# Altium PCB LineFollower2.PcbDoc
Units mm, origin at the board's own origin, x right, y up, seen from the top; angles counter-clockwise.
Board outline 127.85 x 141.85 mm, 2 copper layers (Top Layer, Bottom Layer); 44 components, 62 nets, 172 pads, 4 vias.
Unrouted connection lines stored in the file: 5.
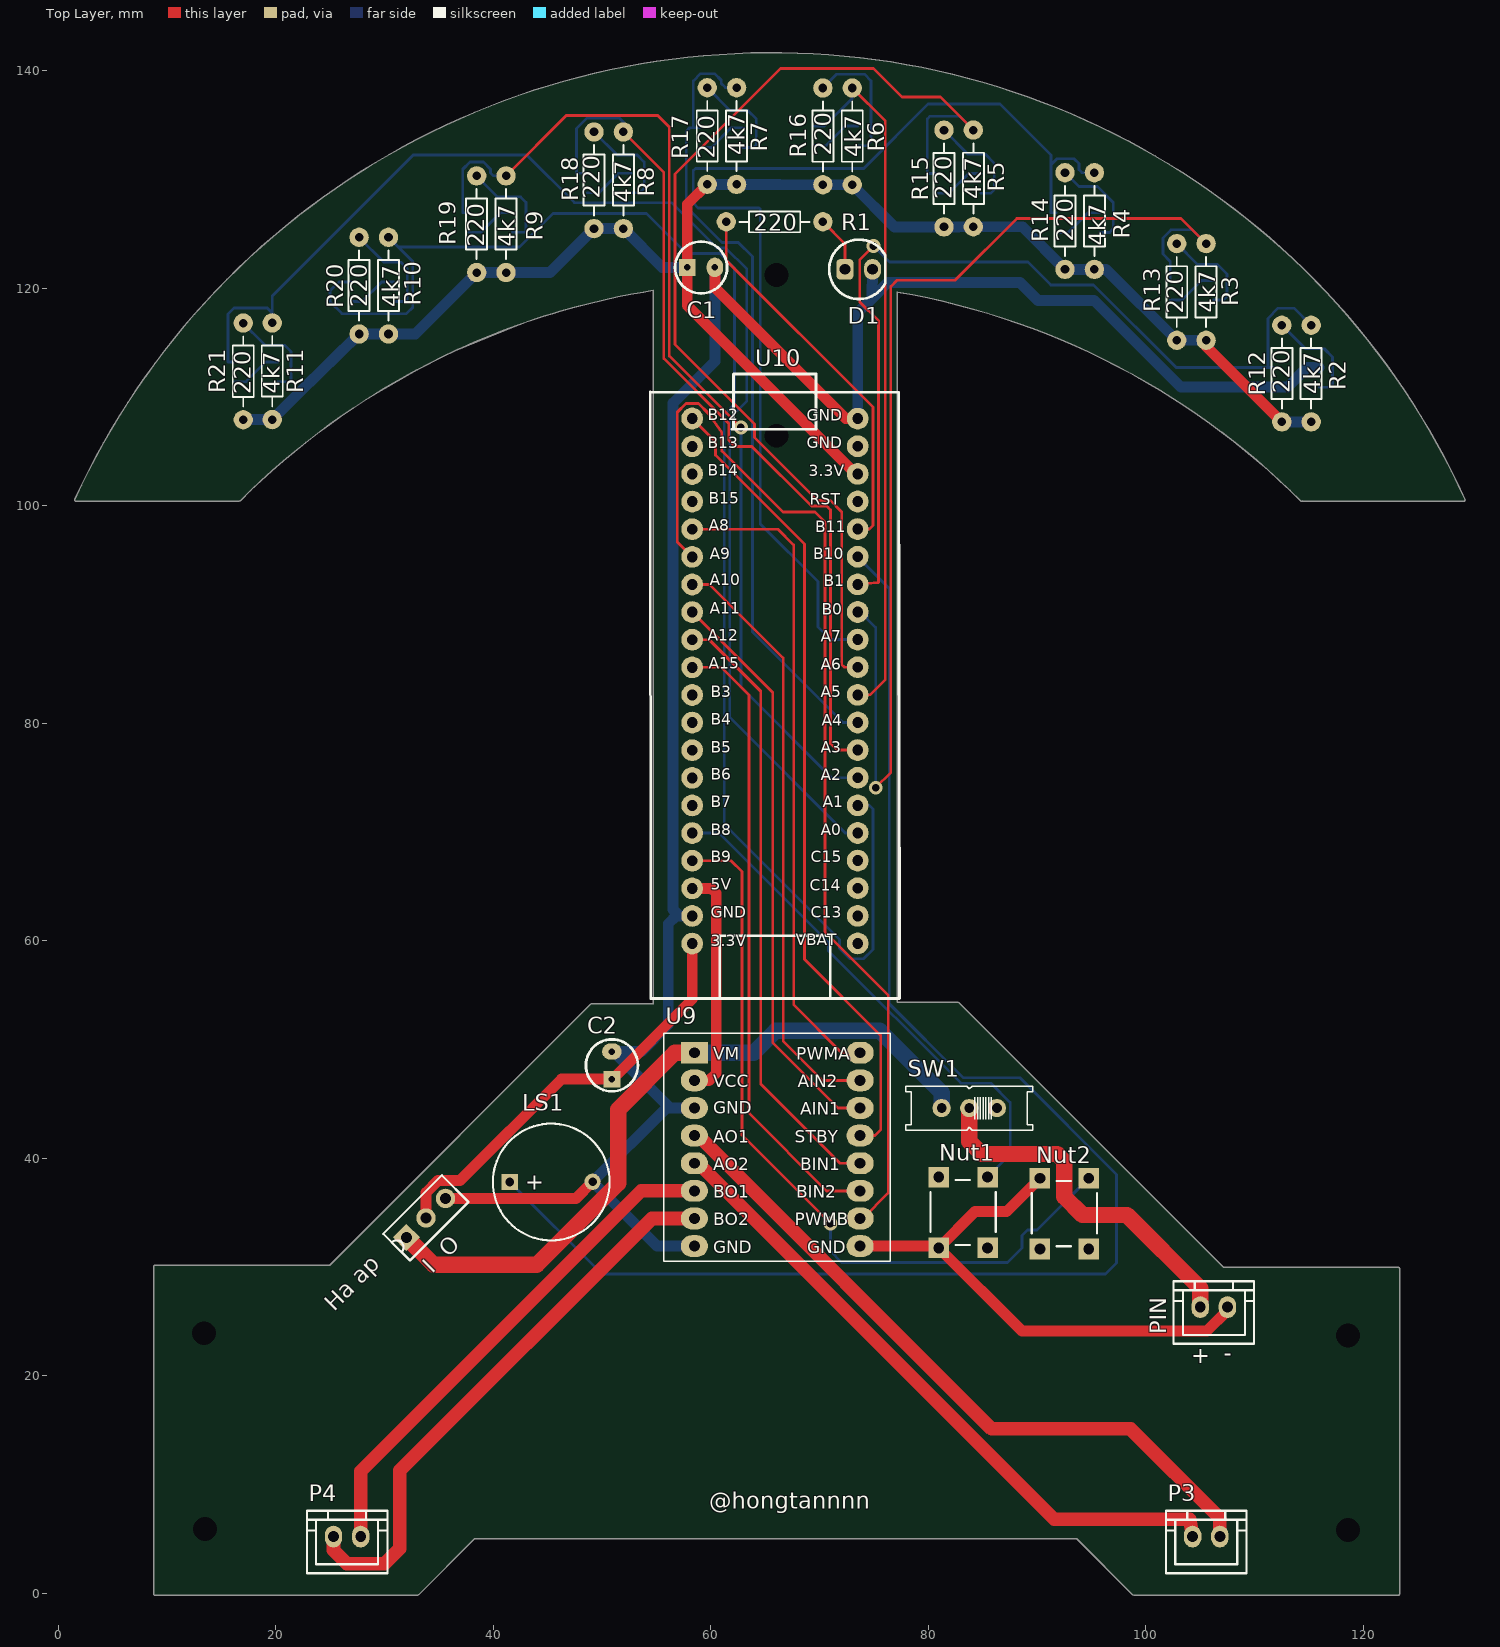
[diagram p0: Top Layer view]
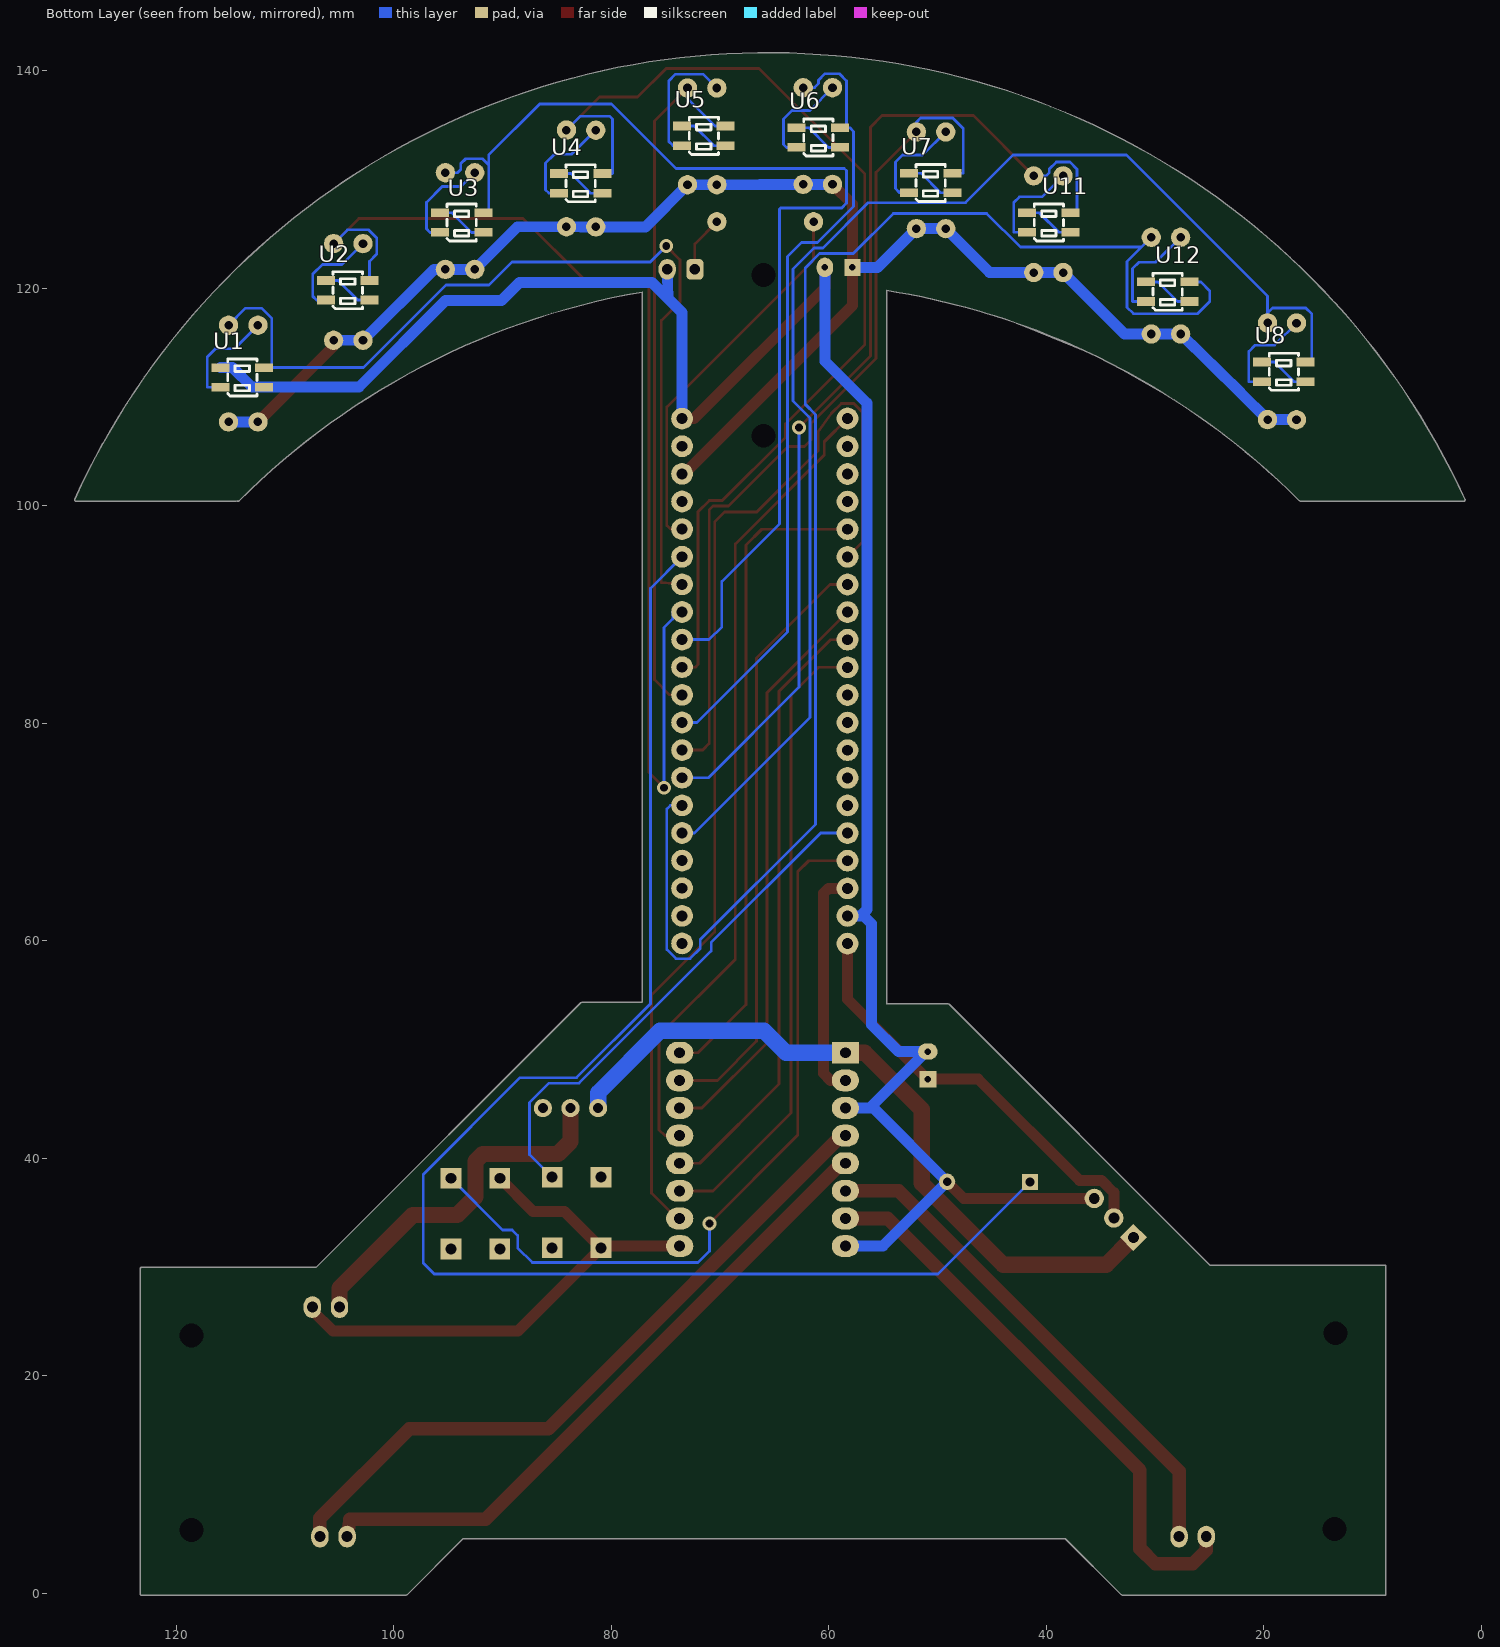
[diagram p1: Bottom Layer view, seen from below]

## Layer stack, top to bottom
Top Solder: solder mask 0.0102, Solder Resist, Dk 3.5
Top Layer: signal copper 0.0356
Dielectric 1: dielectric 0.32, FR-4, Dk 4.8
Bottom Layer: signal copper 0.0356
Bottom Solder: solder mask 0.0102, Solder Resist, Dk 3.5

## Board outline
8.773,30.026 cw(c8.9,30.026) 8.9,30.153 24.947,30.153 48.936,54.141 49.026,54.179 54.677,54.179 54.698,54.2 54.698,119.785 ccw(c65.474,51.685) 53.81,119.639 ccw(c65.475,51.677) 51.447,119.19 ccw(c65.476,51.676) 46.131,117.864 ccw(c65.473,51.683) 44.761,117.448 ccw(c65.476,51.674) 42.78,116.791 ccw(c65.481,51.662) 42.232,116.597 37.018,114.487 cw(c65.476,51.675) 42.232,116.597 42.78,116.791 36.489,114.244 cw(c65.48,51.665) 37.018,114.487 36.489,114.244 ccw(c65.476,51.675) 32.999,112.506 ccw(c65.477,51.674) 31.92,111.918 ccw(c65.476,51.674) 30.44,111.069 31.92,111.918 32.999,112.506 29.387,110.435 cw(c65.478,51.672) 30.44,111.069 29.387,110.435 ccw(c65.476,51.676) 16.716,100.436 16.626,100.398 16.372,100.398 1.626,100.398 cw(c1.626,100.526) 1.51,100.579 cw(c65.476,71.276) 59.333,141.365 cw(c65.676,71.776) 129.342,100.578 129.353,100.526 cw(c129.226,100.526) 129.226,100.398 114.493,100.398 114.409,100.429 cw(c114.326,100.526) 114.236,100.436 ccw(c65.476,51.676) 100.097,111.311 98.609,112.151 cw(c65.476,51.676) 100.097,111.311 98.609,112.151 ccw(c65.476,51.676) 77.153,119.637 77.153,54.349 77.174,54.327 82.726,54.327 82.816,54.29 107.153,29.953 123.2,29.953 cw(c123.2,29.826) 123.327,29.826 123.327,29.8 123.327,-0.074 cw(c123.2,-0.074) 123.2,-0.202 98.888,-0.202 98.798,-0.164 93.635,4.998 38.265,4.998 33.102,-0.164 33.012,-0.202 8.9,-0.202 cw(c8.9,-0.074) 8.773,-0.074

## Design rules (kind name [scope] priority, off if disabled: settings)
AssemblyTestPointUsage [All] p0: scope1count=1 scope1_0_kind=Board scope1_0_value=Board scope2count=1 scope2_0_kind=Board scope2_0_value=Board commentlength=0
AssemblyTestpoint [All] p0: scope1count=1 scope1_0_kind=Board scope1_0_value=Board scope2count=1 scope2_0_kind=Board scope2_0_value=Board commentlength=0
Clearance [All] p0: scope1count=1 scope1_0_kind=Board scope1_0_value=Board scope2count=1 scope2_0_kind=Board scope2_0_value=Board commentlength=0 gap=0.254
Clearance [All] p1: gap=0.254 ignorepadtopadclearanceinfootprint=FALSE
ComponentClearance [All] p0: scope1count=1 scope1_0_kind=Board scope1_0_value=Board scope2count=1 scope2_0_kind=Board scope2_0_value=Board commentlength=0 gap=0.254 collisioncheckmode=3
DiffPairsRouting [All] p0: scope1count=1 scope1_0_kind=Board scope1_0_value=Board scope2count=1 scope2_0_kind=Board scope2_0_value=Board commentlength=0
FabricationTestPointUsage [All] p0: scope1count=1 scope1_0_kind=Board scope1_0_value=Board scope2count=1 scope2_0_kind=Board scope2_0_value=Board commentlength=0 valid=0 allowmultiple=FALSE
FabricationTestpoint [All] p0: scope1count=1 scope1_0_kind=Board scope1_0_value=Board scope2count=1 scope2_0_kind=Board scope2_0_value=Board commentlength=0 side=3 testpointundercomponent=TRUE minsize=1.016 maxsize=2.54 preferedsize=1.524 minholesize=0 maxholesize=1.016 preferedholesize=0.813 testpointgrid=0.025
FanoutControl Fanout_BGA [All] p0 off: scope1count=1 scope1_0_kind=Board scope1_0_value=Board scope2count=1 scope2_0_kind=Board scope2_0_value=Board commentlength=69 // Protel DXP Scope 1 Expression Was: IsBGA   Fanout_BGA (Default Rule)
FanoutControl Fanout_LCC [All] p0 off: scope1count=1 scope1_0_kind=Board scope1_0_value=Board scope2count=1 scope2_0_kind=Board scope2_0_value=Board commentlength=69 // Protel DXP Scope 1 Expression Was: IsLCC   Fanout_LCC (Default Rule)
FanoutControl Fanout_SOIC [All] p0 off: scope1count=1 scope1_0_kind=Board scope1_0_value=Board scope2count=1 scope2_0_kind=Board scope2_0_value=Board commentlength=71 // Protel DXP Scope 1 Expression Was: IsSOIC   Fanout_SOIC (Default Rule)
FanoutControl Fanout_Small [All] p0 off: scope1count=1 scope1_0_kind=Board scope1_0_value=Board scope2count=1 scope2_0_kind=Board scope2_0_value=Board commentlength=84 // Protel DXP Scope 1 Expression Was: (CompPinCount < 5)   Fanout_Small (Default Rule)
FanoutControl Fanout_Default [All] p0: scope1count=1 scope1_0_kind=Board scope1_0_value=Board scope2count=1 scope2_0_kind=Board scope2_0_value=Board commentlength=30 // Fanout_Default (Default Rule)
Height [All] p0: scope1count=1 scope1_0_kind=Board scope1_0_value=Board scope2count=1 scope2_0_kind=Board scope2_0_value=Board commentlength=0
HoleSize [All] p0: scope1count=1 scope1_0_kind=Board scope1_0_value=Board scope2count=1 scope2_0_kind=Board scope2_0_value=Board commentlength=0 absolutevalues=TRUE maxlimit=2.54 minlimit=0.025 maxpercent=80.000 minpercent=20.000
HoleToHoleClearance [All] p0: scope1count=1 scope1_0_kind=Board scope1_0_value=Board scope2count=1 scope2_0_kind=Board scope2_0_value=Board commentlength=0
LayerPairs [All] p0: scope1count=1 scope1_0_kind=Board scope1_0_value=Board scope2count=1 scope2_0_kind=Board scope2_0_value=Board commentlength=0 enforce=TRUE
MinimumSolderMaskSliver [All] p0: scope1count=1 scope1_0_kind=Board scope1_0_value=Board scope2count=1 scope2_0_kind=Board scope2_0_value=Board commentlength=0
NetAntennae [All] p0: scope1count=1 scope1_0_kind=Board scope1_0_value=Board scope2count=1 scope2_0_kind=Board scope2_0_value=Board commentlength=0
PasteMaskExpansion [All] p0: scope1count=1 scope1_0_kind=Board scope1_0_value=Board scope2count=1 scope2_0_kind=Board scope2_0_value=Board commentlength=0 expansion=0
PlaneClearance [All] p0: scope1count=1 scope1_0_kind=Board scope1_0_value=Board scope2count=1 scope2_0_kind=Board scope2_0_value=Board commentlength=0 clearance=0.508
PlaneConnect [All] p0: scope1count=1 scope1_0_kind=Board scope1_0_value=Board scope2count=1 scope2_0_kind=Board scope2_0_value=Board commentlength=0 planeconnectstyle=Relief reliefexpansion=0.508 reliefentries=4 reliefconductorwidth=0.254 reliefairgap=0.254
PolygonConnect [All] p0: scope1count=1 scope1_0_kind=Board scope1_0_value=Board scope2count=1 scope2_0_kind=Board scope2_0_value=Board commentlength=0 connectstyle=Relief reliefconductorwidth=0.254 reliefentries=4 polygonreliefangle="90 Angle"
PolygonConnect [All] p1: connectstyle=Relief reliefconductorwidth=0.254 reliefentries=4 polygonreliefangle="90 Angle" airgapwidth=0.254
RoutingCorners [All] p0: scope1count=1 scope1_0_kind=Board scope1_0_value=Board scope2count=1 scope2_0_kind=Board scope2_0_value=Board commentlength=0 cornerstyle=45-Degree minsetback=2.54 maxsetback=2.54
RoutingLayers [All] p0: scope1count=1 scope1_0_kind=Board scope1_0_value=Board scope2count=1 scope2_0_kind=Board scope2_0_value=Board commentlength=0 top layer=Automatic bottom layer=Automatic
RoutingPriority [All] p0: scope1count=1 scope1_0_kind=Board scope1_0_value=Board scope2count=1 scope2_0_kind=Board scope2_0_value=Board commentlength=0
RoutingTopology [All] p0: scope1count=1 scope1_0_kind=Board scope1_0_value=Board scope2count=1 scope2_0_kind=Board scope2_0_value=Board commentlength=0 topology=Shortest
RoutingVias [All] p0: scope1count=1 scope1_0_kind=Board scope1_0_value=Board scope2count=1 scope2_0_kind=Board scope2_0_value=Board commentlength=0 holewidth=0.711 width=1.27 viastyle="Through Hole" minholewidth=0.711 minwidth=1.27 maxholewidth=0.711 maxwidth=1.27
RoutingVias [All] p1: holewidth=0.711 width=1.27 viastyle="Through Hole" minholewidth=0.711 minwidth=1.27 maxholewidth=0.711 maxwidth=1.27
ShortCircuit [All] p0: scope1count=1 scope1_0_kind=Board scope1_0_value=Board scope2count=1 scope2_0_kind=Board scope2_0_value=Board commentlength=0 allowed=FALSE
SilkToBoardRegionClearance [All] p0: scope1count=1 scope1_0_kind=Board scope1_0_value=Board scope2count=1 scope2_0_kind=Board scope2_0_value=Board commentlength=0
SilkToSilkClearance [All] p0: scope1count=1 scope1_0_kind=Board scope1_0_value=Board scope2count=1 scope2_0_kind=Board scope2_0_value=Board commentlength=0
SilkToSolderMaskClearance [All] p0 off: scope1count=1 scope1_0_kind=Board scope1_0_value=Board scope2count=1 scope2_0_kind=Board scope2_0_value=Board commentlength=44 // Protel DXP Scope 1 Expression Was: IsPad
SolderMaskExpansion [All] p0: scope1count=1 scope1_0_kind=Board scope1_0_value=Board scope2count=1 scope2_0_kind=Board scope2_0_value=Board commentlength=0 expansion=0.102
SolderMaskExpansion [All] p1: expansion=0.102 istentingtop=FALSE
SupplyNets "Schematic Supply Nets_1" [All] p0: scope1count=1 scope1_0_kind=Net scope1_0_value=GND scope2count=1 scope2_0_kind=Board scope2_0_value=Board commentlength=0 voltage=0.000
SupplyNets "Schematic Supply Nets_1" [InNet('GND')] p1: voltage=0.000
UnRoutedNet [All] p0: scope1count=1 scope1_0_kind=Board scope1_0_value=Board scope2count=1 scope2_0_kind=Board scope2_0_value=Board commentlength=0
UnpouredPolygon [All] p0: scope1count=1 scope1_0_kind=Board scope1_0_value=Board scope2count=1 scope2_0_kind=Board scope2_0_value=Board commentlength=0
Width 7.4V [All] p0: scope1count=1 scope1_0_kind=Net scope1_0_value=7.4V scope2count=1 scope2_0_kind=Board scope2_0_value=Board commentlength=0 maxlimit=2 minlimit=0.254 preferedwidth=1.5
Width "3.3V Tu" [All] p0: scope1count=1 scope1_0_kind=Net scope1_0_value=NetC2_2 scope2count=1 scope2_0_kind=Board scope2_0_value=Board commentlength=0 maxlimit=0.7 minlimit=0.254 preferedwidth=0.7
Width "Ha ap" [All] p0: scope1count=1 scope1_0_kind=Net scope1_0_value=VOUT scope2count=1 scope2_0_kind=Board scope2_0_value=Board commentlength=0 maxlimit=1.5 minlimit=0.5 preferedwidth=1
Width PIN [All] p0: scope1count=1 scope1_0_kind=Net scope1_0_value=NetPIN_1 scope2count=1 scope2_0_kind=Board scope2_0_value=Board commentlength=0 maxlimit=2 minlimit=0.5 preferedwidth=1.5
Width GND [All] p0: scope1count=1 scope1_0_kind=Net scope1_0_value=GND scope2count=1 scope2_0_kind=Board scope2_0_value=Board commentlength=0 maxlimit=1.25 minlimit=0.5 preferedwidth=1
Width B01 [All] p0: scope1count=1 scope1_0_kind=Net scope1_0_value=NetP4_2 scope2count=1 scope2_0_kind=Board scope2_0_value=Board commentlength=0 maxlimit=1.5 minlimit=0.5 preferedwidth=1.25
Width B02 [All] p0: scope1count=1 scope1_0_kind=Net scope1_0_value=NetP4_1 scope2count=1 scope2_0_kind=Board scope2_0_value=Board commentlength=0 maxlimit=1.5 minlimit=0.5 preferedwidth=1.25
Width A01 [All] p0: scope1count=1 scope1_0_kind=Net scope1_0_value=NetP3_2 scope2count=1 scope2_0_kind=Board scope2_0_value=Board commentlength=0 maxlimit=1.5 minlimit=0.5 preferedwidth=1.25
Width A02 [All] p0: scope1count=1 scope1_0_kind=Net scope1_0_value=NetP3_1 scope2count=1 scope2_0_kind=Board scope2_0_value=Board commentlength=0 maxlimit=1.5 minlimit=0.5 preferedwidth=1.25
Width 11.1V [All] p0: scope1count=1 scope1_0_kind=Net scope1_0_value=11.1V scope2count=1 scope2_0_kind=Board scope2_0_value=Board commentlength=0 maxlimit=2 minlimit=0.5 preferedwidth=1.5
Width 5V [All] p0: scope1count=1 scope1_0_kind=Net scope1_0_value=5V scope2count=1 scope2_0_kind=Board scope2_0_value=Board commentlength=0 maxlimit=1.5 minlimit=0.5 preferedwidth=1
Width 3.3V [All] p0: scope1count=1 scope1_0_kind=Net scope1_0_value=3.3V scope2count=1 scope2_0_kind=Board scope2_0_value=Board commentlength=0 maxlimit=1.5 minlimit=0.5 preferedwidth=1
Width [All] p0: scope1count=1 scope1_0_kind=Board scope1_0_value=Board scope2count=1 scope2_0_kind=Board scope2_0_value=Board commentlength=0 maxlimit=0.254 minlimit=0.254 preferedwidth=0.254
Width 7.4V [InNet('7.4V')] p1: maxlimit=2 minlimit=0.254 preferedwidth=1.5
Width "3.3V Tu" [InNet('NetC2_2')] p2: maxlimit=0.7 minlimit=0.254 preferedwidth=0.7
Width "Ha ap" [InNet('VOUT')] p3: maxlimit=1.5 minlimit=0.5 preferedwidth=1
Width PIN [InNet('NetPIN_1')] p4: maxlimit=2 minlimit=0.5 preferedwidth=1.5
Width GND [InNet('GND')] p5: maxlimit=1.25 minlimit=0.5 preferedwidth=1
Width B01 [InNet('NetP4_2')] p6: maxlimit=1.5 minlimit=0.5 preferedwidth=1.25
Width B02 [InNet('NetP4_1')] p7: maxlimit=1.5 minlimit=0.5 preferedwidth=1.25
Width A01 [InNet('NetP3_2')] p8: maxlimit=1.5 minlimit=0.5 preferedwidth=1.25
Width A02 [InNet('NetP3_1')] p9: maxlimit=1.5 minlimit=0.5 preferedwidth=1.25
Width 11.1V [InNet('11.1V')] p10: maxlimit=2 minlimit=0.5 preferedwidth=1.5
Width 5V [InNet('5V')] p11: maxlimit=1.5 minlimit=0.5 preferedwidth=1
Width 3.3V [InNet('3.3V')] p12: maxlimit=1.5 minlimit=0.5 preferedwidth=1
Width [All] p13: maxlimit=0.254 minlimit=0.254 preferedwidth=0.254
30 further rules are at their usual default settings.

## Components (designator, comment, footprint, x,y, rotation, side; value= is the part's Value field where it differs from the comment)
C1 "CN-ALU-DIP" CA-ALU-2.54 59.1,121.9 r0 top
C2 "CN-ALU-DIP" CA-ALU-2.54 50.9,48.53 r90 top
D1 "Led" "LED 5MM - RED" 73.596,121.726 r0 top
"Ha ap" "Hạ áp 3.3V" CON3 32.004,32.704 r135 top
LS1 "Speaker" SPEAKER 41.506,37.813 r0 top
Nut1 "Button" 1825910-6_BUTTON 83.2,35 r0 top (schematic designator Button1)
Nut2 "Button" 1825910-6_BUTTON 92.5,34.9 r0 top (schematic designator Button2)
P3 "B2B-XH-A(LF)(SN)" JST-B2B-XH-A_V 105.55,5.2 r0 top
P4 "B2B-XH-A(LF)(SN)" JST-B2B-XH-A_V 26.55,5.2 r0 top
PIN "B2B-XH-A(LF)(SN)" JST-B2B-XH-A_V 106.25,26.3 r0 top
R1 "1k" R1/4W 61.41,126.1 r0 top
R2 "4.7k" R1/4W 115.2,107.7 r90 top
R3 "4.7k" R1/4W 105.541,115.202 r90 top
R4 "4.7k" R1/4W 95.265,121.725 r90 top
R5 "4.7k" R1/4W 84.134,125.643 r90 top
R6 "4.7k" R1/4W 73,129.51 r90 top
R7 "4.7k" R1/4W 62.365,129.542 r90 top
R8 "4.7k" R1/4W 51.954,125.473 r90 top
R9 "4.7k" R1/4W 41.165,121.433 r90 top
R10 "4.7k" R1/4W 30.354,115.783 r90 top
R11 "4.7k" R1/4W 19.665,107.912 r90 top
R12 "220" R1/4W 112.5,107.7 r90 top
R13 "220" R1/4W 102.841,115.202 r90 top
R14 "220" R1/4W 92.565,121.725 r90 top
R15 "220" R1/4W 81.434,125.633 r90 top
R16 "220" R1/4W 70.3,129.51 r90 top
R17 "220" R1/4W 59.665,129.542 r90 top
R18 "220" R1/4W 49.254,125.473 r90 top
R19 "220" R1/4W 38.465,121.433 r90 top
R20 "220" R1/4W 27.654,115.783 r90 top
R21 "220" R1/4W 17,107.9 r90 top
SW1 "EG1218" EG1218 83.76,44.6 r180 top
U1 "" QRE1113 113.934,111.792 r180 bottom
U2 "QRE1113" QRE1113 104.241,119.802 r180 bottom
U3 "QRE1113" QRE1113 93.765,126.025 r180 bottom
U4 "QRE1113" QRE1113 82.834,129.633 r180 bottom
U5 "QRE1113" QRE1113 71.5,134 r180 bottom
U6 "QRE1113" QRE1113 60.965,133.842 r180 bottom
U7 "QRE1113" QRE1113 50.654,129.673 r180 bottom
U8 "QRE1113" QRE1113 18.165,112.302 r180 bottom
U9 "MODULE_TB6612FNG" MODULE_TB6612FNG 66.1,40.8 r0 top
U10 "STM32" STM32 65.893,83.872 r180 top
U11 "QRE1113" QRE1113 39.765,126.033 r180 bottom
U12 "QRE1113" QRE1113 28.854,119.673 r180 bottom

## Footprints (in the part's own frame and the unit in brackets; to place one, negate y for a bottom-side part, rotate by r counter-clockwise, add the part's x,y. Pads: shape width x height; smd on the part's side, far side on the other; paste and mask are expansions set on the pad)
1825910-6_BUTTON [mm]
  rect 1.9x1.9 hole 1: 1(2.25,3.25) 2(2.25,-3.25) 3(-2.25,-3.25) 4(-2.25,3.25)
  silkscreen extent -3,-3 3,3
CA-ALU-2.54 [mm]
  rect 1.5x1.58 hole 0.6: 1(-1.27,0)
  oval 1.5x1.8 hole 0.6: 2(1.27,0)
  silkscreen extent -2.39,-2.39 2.39,2.39
CON3 [mil]
  rect 70x70 hole 39.37 unplated: 1(0,0)
  round 70 hole 39.37 unplated: 2(0,-100) 3(0,-200)
  silkscreen extent -68,-250 68,50
EG1218 [mil]
  round 66 hole 35.43: 1(-100,0) 2(0,0) 3(100,0)
  silkscreen extent -230,-80 230,80
JST-B2B-XH-A_V [mm]
  oval 1.6x2 hole 1 mask+0: 1(-1.25,0) 2(1.25,0)
  silkscreen extent -3.7,-3.38 3.7,2.37
"LED 5MM - RED" [mil]
  rrect50% 62x75 hole 39: 1(-50,0)
  oval 62x75 hole 39: 2(50,0)
  silkscreen extent -107,-108 96,108
MODULE_TB6612FNG [mm] "Module Dual Motor Driver 2.5-13.5V 3.2A Peak 21x18mm"
  rect 2.5x2 hole 1: 1(-7.62,8.89)
  oval 2.5x2 hole 1: 2(-7.62,6.35) 3(-7.62,3.81) 4(-7.62,1.27) 5(-7.62,-1.27) 6(-7.62,-3.81) 7(-7.62,-6.35) 8(-7.62,-8.89) 9(7.62,-8.89) 10(7.62,-6.35) 11(7.62,-3.81) 12(7.62,-1.27) 13(7.62,1.27) 14(7.62,3.81) 15(7.62,6.35) 16(7.62,8.89)
  silkscreen extent -10.44,-10.28 10.39,10.67
QRE1113 [mm] "REFLECTIVE OPTICAL SENSOR SMD"
  rect 1.66x0.8 smd: 1(-2,-0.9) 2(2,-0.9) 3(2,0.9) 4(-2,0.9)
  silkscreen extent -1.35,-1.7 1.35,1.7
R1/4W [mil] "R 1/4W, 2 Pin, 350mil"
  round 70 hole 31: 1(0,0) 2(350,0)
  silkscreen extent 48,-38 302,38
SPEAKER [mm]
  rect 1.5x1.5 hole 0.8: 1(0,0)
  round 1.5 hole 0.8: 2(7.62,0.013)
  silkscreen extent -1.55,-5.38 9.18,5.36
STM32 [mm]
  round 2 hole 1: 1(7.607,-24.143) 2(7.607,-21.577) 3(7.607,-19.037) 4(7.607,-16.497) 5(7.607,-13.957) 6(7.607,-11.417) 7(7.607,-8.877) 8(7.607,-6.337) 9(7.607,-3.797) 10(7.607,-1.257) 11(7.607,1.283) 12(7.607,3.823) 13(7.607,6.363) 14(7.607,8.903) 15(7.607,11.443) 16(7.607,13.983) 17(7.607,16.523) 18(7.607,19.063) 19(7.607,21.603) 20(7.607,24.143) 21(-7.607,24.132) 22(-7.607,21.592) 23(-7.607,19.052) 24(-7.607,16.512) 25(-7.607,13.972) 26(-7.607,11.432) 27(-7.607,8.892) 28(-7.607,6.352) 29(-7.607,3.812) 30(-7.607,1.272) 31(-7.607,-1.268) 32(-7.607,-3.808) 33(-7.607,-6.348) 34(-7.607,-8.888) 35(-7.607,-11.428) 36(-7.607,-13.968) 37(-7.607,-16.508) 38(-7.607,-19.048) 39(-7.607,-21.588) 40(-7.607,-24.128)
  silkscreen extent -11.44,-28.23 11.47,29.2

## Part data
C1 C2: "Capacitor (Semiconductor SIM Model)"
D1: "Typical LED"
"Ha ap": library part CON3, "Connector"
LS1: "Loudspeaker"
Nut1 Nut2: library part 1825910-6, "SWITCH TACTILE SPST-NO 0.05A 24V"
P3 P4 PIN: library part HEADER_2P_2.5MM, "CONN HEADER VERT 2POS 2.5MM"
R1 R2 R3 R4 R5 R6 R7 R8 R9 R10 R11 R12 R13 R14 R15 R16 R17 R18 R19 R20 R21: library part Res, "Resistor 1/4W"
SW1: library part SW_SPDT, "SWITCH SLIDE SPDT 200MA 30V"
U1: library part QRE1113, "REFLECTIVE OPTICAL SENSOR SMD"
U2 U3 U4 U5 U6 U7 U8 U11 U12: "REFLECTIVE OPTICAL SENSOR SMD"
U9: "Module Dual Motor Driver 2.5-13.5V 3.2A Peak 21x18mm"

## Free pads (board coordinates)
  round 1.524 hole 2.2: 2(13.4,23.9) 2(13.5,5.9) 2(66.026,106.426) 2(66.026,121.226) 2(118.6,5.8) 2(118.6,23.7)

## Via types
v1: diameter 1.27, hole 0.711, Top Layer to Bottom Layer, 4 vias

## Nets (pads, with @x,y where several pads share a name; then routed paths per layer and width w, separated by ;. In a path a pad name is that pad's centre, name@x,y a point inside that pad or via, vN(x,y) a via of type N, cw(c..) or ccw(c..) an arc to the next point about the centre after c; other vN are vias at no path point)
3.3V: "Ha ap.2" C1.1 C2.1 R2.1 R3.1 R4.1 R5.1 R6.1 R7.1 R8.1 R9.1 R10.1 R11.1 R12.1 R13.1 R14.1 R15.1 R16.1 R17.1 R18.1 R19.1 R20.1 R21.1 U10.20 U10.38 | length 187.7
  Top Layer w1: 33.8,34.5 33.8,36.824 34.915,37.939 36.939,37.939 46.26,47.26 C2.1 50.94,47.26 58.285,54.605 U10.20 ; R17.1 57.83,127.707 C1.1 57.83,118.413 73.323,102.92 U10.38 ; R3.1 105.541,114.659 R12.1
  Bottom Layer w1: R21.1 17.012,107.912 R11.1 22.139,110.386 R20.1 R10.1 32.815,115.783 R19.1 R9.1 45.214,121.433 R18.1 R8.1 55.527,121.9 C1.1 ; R17.1 R7.1 66.315,129.542 66.347,129.51 R16.1 R6.1 76.877,125.633 R15.1 82.774,125.633 82.784,125.643 R5.1 88.647,125.643 R14.1 R4.1 96.318,121.725 R13.1 R3.1 ; R12.1 R2.1
5V: U9.2 U10.18 | length 21.2
  Top Layer w1: U10.18 60.041,64.809 60.498,64.352 60.498,47.81 59.838,47.15 U9.2
7.4V: "Ha ap.1" PIN.1 SW1.2 SW1.3 U9.1 | length 100.5
  Top Layer w1.5: 32.004,32.704 34.508,30.2 43.98,30.2 51.469,37.688 51.469,44.469 56.69,49.69 U9.1 ; SW1.2 83.76,41.527 84.903,40.384 91.842,40.384 92.502,39.723 92.502,36.447 94.178,34.77 98.269,34.77 105,28.039 PIN.1
  Bottom Layer w1.5: U9.1 63.937,49.69 65.959,51.712 75.529,51.712 81.22,46.021 SW1.3
GND: "Ha ap.3" C1.2 C2.2 D1.2 LS1.2 Nut1.3 Nut2.4 PIN.2 U1.2 U1.4 U9.3 U9.8 U9.9 U10.19 U10.39 U10.40 | length 255.7
  Top Layer w1: 35.596,36.296 47.596,36.296 LS1.2 ; C1.2 60.37,120.03 72.4,108 U10.40 ; U9.9 80.79,31.91 Nut1.3 ; Nut2.4 87.2,35.1 84.3,35.1 Nut1.3 ; PIN.2 107.5,26 105.6,24.1 88.6,24.1 Nut1.3
  Bottom Layer w1: C2.2 C2.2@51.05,49.8 ; U10.19 57.104,62.269 ; U9.8 55.041,31.91 LS1.2 55.91,44.61 56.24,44.61 ; U9.3 56.24,44.61 ; C1.2 60.37,113.281 56.51,109.421 56.51,62.863 57.104,62.269 ; U10.40 73.5,117.749 74.808,119.057 ; D1.2 74.808,119.057 ; U1.4 114.825,112.692 113.025,110.892 U1.2 103.223,110.892 95.245,118.87 90.089,118.87 88.438,120.521 76.271,120.521 74.808,119.057 ; C2.2@51.05,49.8 53.608,49.8 56.078,52.271 56.078,61.558 56.79,62.269 57.104,62.269 ; C2.2@51.05,49.8 56.24,44.61
NetD1_1: D1.1 R1.2 | length 5.2
  Top Layer w0.254: R1.2 72.326,124.074 D1.1
NetP3_1: P3.1 U9.5 | length 60.7
  Top Layer w1.25: U9.5 58.847,39.53 91.573,6.805 104.034,6.805 P3.1
NetP3_2: P3.2 U9.4 | length 64.6
  Top Layer w1.25: U9.4 58.847,42.07 85.813,15.104 98.596,15.104 106.8,6.9 P3.2
NetP4_1: P4.1 U9.7 | length 52.3
  Top Layer w1.25: P4.1 25.3,3.935 26.535,2.7 30,2.7 31.4,4.1 31.4,11.273 54.577,34.45 U9.7
NetP4_2: P4.2 U9.6 | length 47.4
  Top Layer w1.25: P4.2 27.8,11.2 53.59,36.99 U9.6
NetR12_2: R12.2 U1.1 | length 9.9
  Bottom Layer w0.254: R12.2 114.665,114.425 116.403,114.425 117.165,113.663 117.165,110.892 U1.1
NetR13_2: R13.2 U2.1 | length 9.2
  Bottom Layer w0.254: R13.2 104.761,122.172 106.574,122.172 107.463,121.283 107.463,119.251 107.114,118.902 U2.1
NetR14_2: R14.2 U3.1 | length 9.4
  Bottom Layer w0.254: R14.2 93.846,129.334 95.55,129.334 96.998,127.887 96.998,125.456 96.668,125.125 U3.1
NetR15_2: R15.2 U4.1 | length 9.7
  Bottom Layer w0.254: R15.2 83.651,132.306 85.238,132.306 86.05,131.493 86.05,129.038 85.746,128.733 U4.1
NetR16_2: R16.2 U5.1 | length 12.2
  Bottom Layer w0.254: R16.2 71.572,139.672 74.112,139.672 74.722,139.063 74.722,133.475 74.347,133.1 U5.1
NetR17_2: R17.2 U6.1 | length 9.4
  Bottom Layer w0.254: R17.2 61.753,136.345 63.394,136.345 64.181,135.557 64.181,133.221 63.903,132.942 U6.1
NetR18_2: R18.2 U7.1 | length 9.6
  Bottom Layer w0.254: R18.2 51.387,132.23 53.234,132.23 53.869,131.595 53.869,129.154 53.488,128.773 U7.1
NetR19_2: R19.2 U11.1 | length 9.5
  Bottom Layer w0.254: R19.2 40.394,128.395 42.489,128.395 42.997,127.887 42.997,125.133 U11.1
NetR20_2: R20.2 U12.1 | length 9.9
  Bottom Layer w0.254: R20.2 29.952,122.375 31.491,122.375 32.075,121.791 32.075,118.773 U12.1
NetR21_2: R21.2 U8.1 | length 9.6
  Bottom Layer w0.254: R21.2@16.865,116.902 19.012,114.755 20.798,114.755 21.382,114.171 21.382,111.402 U8.1
NetU2_2: U2.2 U2.4 | length 4.7
  Bottom Layer w0.254: U2.2 103.322,118.902 105.123,120.702 U2.4
NetU3_2: U3.2 U3.4 | length 4.7
  Bottom Layer w0.254: U3.2 92.858,125.125 94.658,126.925 U3.4
NetU4_2: U4.2 U4.4 | length 4.7
  Bottom Layer w0.254: U4.2 81.91,128.733 83.71,130.533 U4.4
NetU5_2: U5.2 U5.4 | length 4.7
  Bottom Layer w0.254: U5.2 70.582,133.1 72.382,134.9 U5.4
NetU6_2: U6.2 U6.4 | length 4.7
  Bottom Layer w0.254: U6.2 60.041,132.942 61.841,134.742 U6.4
NetU7_2: U7.2 U7.4 | length 4.7
  Bottom Layer w0.254: U7.2 49.728,128.773 51.529,130.573 U7.4
NetU8_2: U8.2 U8.4 | length 4.7
  Bottom Layer w0.254: U8.2 17.242,111.402 19.042,113.202 U8.4
NetU11_2: U11.2 U11.4 | length 4.7
  Bottom Layer w0.254: U11.2 38.857,125.133 40.657,126.933 U11.4
NetU12_2: U12.2 U12.4 | length 4.7
  Bottom Layer w0.254: U12.2 27.935,118.773 29.735,120.573 U12.4
NRST: U10.37
PA0: R11.2 U8.3 U10.25 | length 123.3
  Bottom Layer w0.254: U8.3 15.591,113.202 15.591,117.625 16.15,118.184 19.208,118.184 19.665,117.727 ; R11.2 19.665,117.727 ; U10.25 72.36,69.9 61.743,80.517 61.743,108.064 63.309,109.631 63.309,121.741 61.362,123.689 60.555,123.689 56.383,127.861 47.442,127.861 43.074,132.23 32.634,132.23 19.665,119.261 19.665,117.727
PA1: R10.2 U10.26 U12.3 | length 138.8
  Bottom Layer w0.254: U12.3 25.802,120.573 24.989,119.76 24.989,118.743 26.081,117.65 31.999,117.65 32.583,118.235 32.583,122.444 31.255,123.772 ; R10.2 31.255,123.772 ; U10.26 74.57,72.44 74.9,72.11 74.9,59.18 74.062,58.341 72.766,58.341 71.826,59.281 71.826,60.094 61.235,70.686 61.235,108.385 62.174,109.325 62.174,121.86 60.854,123.181 57.761,123.181 54.072,126.871 45.49,126.871 42.392,123.772 31.255,123.772
PA2: R9.2 U10.27 U11.3 | length 95.7
  Top Layer w0.254: R9.2 46.704,135.862 55.113,135.862 56.18,134.795 56.18,113.764 v1(62.759,107.186)
  Bottom Layer w0.254: U11.3 37.181,126.933 37.181,130.935 37.841,131.595 39.086,131.595 39.746,130.935 39.746,130.603 40.026,130.323 R9.2 ; v1(62.759,107.186) 62.759,83.31 71.088,74.98 U10.27
PA3: R8.2 U7.3 U10.28 | length 79.5
  Top Layer w0.254: R8.2 55.672,130.645 55.672,113.53 61.642,107.56 61.642,106.043 62.237,105.448 63.754,105.448 69.242,99.96 70.659,99.96 71.008,99.611 71.008,78.11 71.598,77.52 U10.28
  Bottom Layer w0.254: U7.3 47.646,130.573 47.646,134.668 48.611,135.634 51.573,135.634 51.954,135.253 R8.2
PA4: R7.2 U6.3 U10.29 | length 73.2
  Bottom Layer w0.254: U6.3 U6.3@58.39,134.742 ; R7.2 61.332,138.432 60.955,138.809 60.955,139.113 60.346,139.723 59.05,139.723 58.39,139.063 U6.3@58.39,134.742 ; U10.29 72.131,80.06 63.817,88.374 63.817,122.897 62.517,124.197 61.038,124.197 57.729,127.506 57.729,134.412 58.06,134.742 U6.3@58.39,134.742
PA5: R6.2 U5.3 U10.30 | length 64.3
  Top Layer w0.254: R6.2 76.043,135.357 76.043,83.995 74.647,82.6 U10.30
  Bottom Layer w0.254: U5.3 70.458,134.9 73,137.442 R6.2
PA6: R5.2 U4.3 U10.31 | length 98.3
  Top Layer w0.254: U10.31 72.284,85.14 72.03,85.394 72.03,99.433 70.995,100.468 69.807,100.468 64.007,106.268 64.007,107.505 56.697,114.815 56.697,130.486 66.416,140.206 74.951,140.206 77.592,137.564 81.103,137.564 R5.2
  Bottom Layer w0.254: U4.3 79.904,130.533 79.904,135.557 80.158,135.811 82.856,135.811 R5.2
PA7: R4.2 U3.3 U10.32 | length 102.4
  Bottom Layer w0.254: U10.32 71.014,87.68 69.845,88.848 69.845,93.012 64.537,98.321 64.537,127.277 64.435,127.379 58.822,127.379 58.39,127.81 58.39,130.808 58.593,131.011 74.062,131.011 79.98,136.929 86.584,136.929 91.283,132.23 91.283,131.341 ; U3.3 91.283,126.925 91.283,131.341 ; R4.2 94.128,130.615 93.848,130.895 93.848,131.443 93.391,131.9 91.842,131.9 91.283,131.341
PA8: U9.16 U10.5 | length 60.1
  Top Layer w0.254: U10.5 66.172,97.829 67.61,96.391 67.61,54.11 72.03,49.69 U9.16
PA9: U9.10 U10.6 | length 101.2
  Top Layer w0.254: U10.6 56.904,96.67 56.904,108.587 57.713,109.396 58.857,109.396 59.763,108.49 61.009,106.742 61.009,105.027 66.63,99.406 69.582,99.406 70.5,98.488 70.5,60.787 76.3,54.987 76.3,36.78 73.97,34.45 U9.10
PA10: U9.15 U10.7 | length 55
  Top Layer w0.254: U10.7 59.888,92.749 66.645,85.993 66.645,50.757 70.252,47.15 U9.15
PA11: U9.14 U10.8 | length 53.2
  Top Layer w0.254: U10.8 65.7,82.795 65.7,50.6 71.69,44.61 U9.14
PA12: U9.12 U10.9 | length 56.5
  Top Layer w0.254: U10.9 59.847,87.669 64.587,82.929 64.587,46.82 71.877,39.53 U9.12
PA15: U9.11 U10.10 | length 57.9
  Top Layer w0.254: U10.10 60.965,85.129 63.495,82.598 63.495,44.143 70.648,36.99 U9.11
PB0: R3.2 U2.3 U10.33 | length 105.6
  Top Layer w0.254: v1(75.154,74.064) 76.551,75.461 76.551,120.165 77.11,120.724 82.444,120.724 88.133,126.413 103.22,126.413 R3.2
  Bottom Layer w0.254: U10.33 74.366,90.22 74.366,89.583 75.154,88.796 v1(75.154,74.064) ; U2.3 102.241,122.461 101.571,123.131 101.571,124.618 102.315,125.362 104.271,125.362 R3.2
PB1: R2.2 U1.3 U10.34 | length 85.3
  Top Layer w0.254: U10.34 75.408,92.936 75.408,117.015 73.681,118.743 73.681,122.603 v1(74.951,123.873)
  Bottom Layer w0.254: v1(74.951,123.873) 76.424,122.4 89.149,122.4 91.257,120.292 95.194,120.292 102.795,112.692 U1.3@111.222,112.692 ; U1.3 U1.3@111.222,112.692 ; R2.2 113.632,118.158 112.162,118.158 111.222,117.219 U1.3@111.222,112.692
PB3: U10.11
PB4: U10.12
PB5: U10.13
PB6: U10.14
PB7: U10.15
PB8: Nut1.1 U10.16 | length 47.7
  Bottom Layer w0.254: U10.16 60.753,69.889 70.827,59.815 70.827,59.054 82.99,46.892 85.732,46.892 87.519,45.105 87.519,40.319 Nut1.1
PB9: Nut2.1 U10.17 | length 71.3
  Top Layer w0.254: U10.17 61.854,67.349 62.86,66.342 62.86,42.111 v1(70.988,33.983)
  Bottom Layer w0.254: v1(70.988,33.983) 70.988,31.443 72.03,30.401 87.27,30.401 88.616,31.748 88.616,32.891 89.124,33.399 89.999,33.399 Nut2.1
PB10: LS1.1 U10.35 | length 137.6
  Bottom Layer w0.254: LS1.1 49.984,29.335 96.284,29.335 97.3,30.351 97.3,38.5 88.4,47.4 83.2,47.4 76.405,54.195 76.405,92.395 U10.35
PB11: R1.1 U10.36 | length 35.1
  Top Layer w0.254: R1.1 61.41,122.555 74.9,109.065 74.9,98.169 74.571,97.84 U10.36
PB12: U9.13 U10.1 | length 74.7
  Top Layer w0.254: U10.1 60.423,105.876 60.423,104.641 68.601,96.464 68.601,58.291 75.611,51.28 75.611,42.603 75.078,42.07 U9.13
PB13: U10.2
PB14: U10.3
PB15: U10.4
PC13: U10.22
PC14: U10.23
PC15: U10.24
VBAT: U10.21
pads on no net: Nut1.2 Nut1.4 Nut2.2 Nut2.3 SW1.1

## Silkscreen, mask and mechanical layers (free items; w line width, h text height)
Top Overlay:
  text "4k7" at 63.111,132.196 h1.52 r90
  text "220" at 71.046,132.154 h1.52 r90
  text "4k7" at 73.846,132.054 h1.52 r90
  text "220" at 60.376,131.905 h1.52 r90
  text "220" at 49.765,128.225 h1.52 r90
  text "220" at 82.145,128.186 h1.52 r90
  text "4k7" at 84.88,128.187 h1.52 r90
  text "4k7" at 52.665,127.835 h1.52 r90
  text "220" at 63.954,125.254 h1.52
  text "220" at 93.311,124.279 h1.52 r90
  text "4k7" at 96.276,123.888 h1.52 r90
  text "220" at 39.176,123.819 h1.52 r90
  text "4k7" at 41.984,123.816 h1.52 r90
  text "220" at 28.411,118.253 h1.52 r90
  text "4k7" at 31.319,118.25 h1.52 r90
  text "4k7" at 106.387,117.756 h1.52 r90
  text "220" at 103.452,117.664 h1.52 r90
  text "220" at 113.211,110.344 h1.52 r90
  text "4k7" at 20.376,110.274 h1.52 r90
  text "220" at 17.711,110.262 h1.52 r90
  text "4k7" at 116.046,110.254 h1.52 r90
  text "O" at 35.9,30.8 h1.52 r45
  text "I" at 34.4,29.3 h1.52 r45
  text "-" at 107.154,21.301 h1.52
  text "+" at 104.154,21.154 h1.52
  text "@hongtannnn" at 59.854,7.762 h1.52

## Text inside footprints (layer, text, board x,y; h text height)
LS1: Top Overlay "+" at 42.915,37.102 h1.52
SW1: Mechanical 13 "QRE1113" at 116.614,107.69 h1.52
U9: Top Overlay "STBY" at 67.726,41.435 h1.14; Top Overlay "AIN1" at 68.234,43.975 h1.14; Top Overlay "BIN2" at 67.853,36.355 h1.14; Top Overlay "PWMB" at 67.726,33.815 h1.14; Top Overlay "BIN1" at 68.234,38.895 h1.14; Top Overlay "GND" at 68.869,31.275 h1.14; Top Overlay "AIN2" at 67.98,46.515 h1.14; Top Overlay "PWMA" at 67.853,49.055 h1.14; Top Overlay "GND" at 60.233,44.102 h1.14; Top Overlay "BO1" at 60.233,36.355 h1.14; Top Overlay "BO2" at 60.233,33.815 h1.14; Top Overlay "AO2" at 60.233,38.895 h1.14; Top Overlay "AO1" at 60.233,41.435 h1.14; Top Overlay "GND" at 60.233,31.275 h1.14; Top Overlay "VCC" at 60.233,46.515 h1.14; Top Overlay "VM" at 60.233,49.055 h1.14
U10: Top Overlay "B12" at 59.7,107.5 h1.78; Top Overlay "GND" at 68.8,107.419 h1.78; Top Overlay "B13" at 59.7,104.92 h1.78; Top Overlay "GND" at 68.8,104.919 h1.78; Top Overlay "A1" at 70.3,71.9 h1.78; Top Overlay "A0" at 70.1,69.319 h1.78; Top Overlay "C14" at 69.1,64.219 h1.78; Top Overlay "C13" at 69.2,61.72 h1.78; Top Overlay "C15" at 69.2,66.819 h1.78; Top Overlay "B6" at 60,74.419 h1.78; Top Overlay "B4" at 60,79.5 h1.78; Top Overlay "B7" at 60,71.9 h1.78; Top Overlay "B14" at 59.7,102.4 h1.78; Top Overlay "B5" at 60,76.919 h1.78; Top Overlay "VBAT" at 67.801,59.2 h1.78; Top Overlay "A10" at 59.9,92.319 h1.78; Top Overlay "A12" at 59.7,87.2 h1.78; Top Overlay "A15" at 59.8,84.619 h1.78; Top Overlay "A9" at 59.9,94.719 h1.78; Top Overlay "B3" at 60,82.02 h1.78; Top Overlay "A11" at 59.9,89.7 h1.78; Top Overlay "A8" at 59.8,97.319 h1.78; Top Overlay "B15" at 59.8,99.819 h1.78; Top Overlay "3.3V" at 69,102.32 h1.78; Top Overlay "B1" at 70.4,92.2 h1.78; Top Overlay "B0" at 70.2,89.619 h1.78; Top Overlay "A7" at 70.1,87.1 h1.78; Top Overlay "A6" at 70.1,84.519 h1.78; Top Overlay "B11" at 69.6,97.2 h1.78; Top Overlay "B10" at 69.4,94.719 h1.78; Top Overlay "RST" at 69.1,99.719 h1.78; Top Overlay "A4" at 70.2,79.4 h1.78; Top Overlay "A3" at 70.1,76.92 h1.78; Top Overlay "A2" at 70.1,74.4 h1.78; Top Overlay "A5" at 70.1,82.019 h1.78; Top Overlay "GND" at 60,61.719 h1.78; Top Overlay "3.3V" at 60,59.12 h1.78; Top Overlay "B8" at 60,69.319 h1.78; Top Overlay "B9" at 60,66.819 h1.78; Top Overlay "5V" at 60,64.319 h1.78